# Altium PCB PCB.PcbDoc
Units mm, origin at the board's own origin, x right, y up, seen from the top; angles counter-clockwise.
Board outline 69.6 x 34.75 mm, 4 copper layers (TOP, GND, PWR, BOTTOM), stack 0.905 mm thick; 91 components, 59 nets, 357 pads, 99 vias.
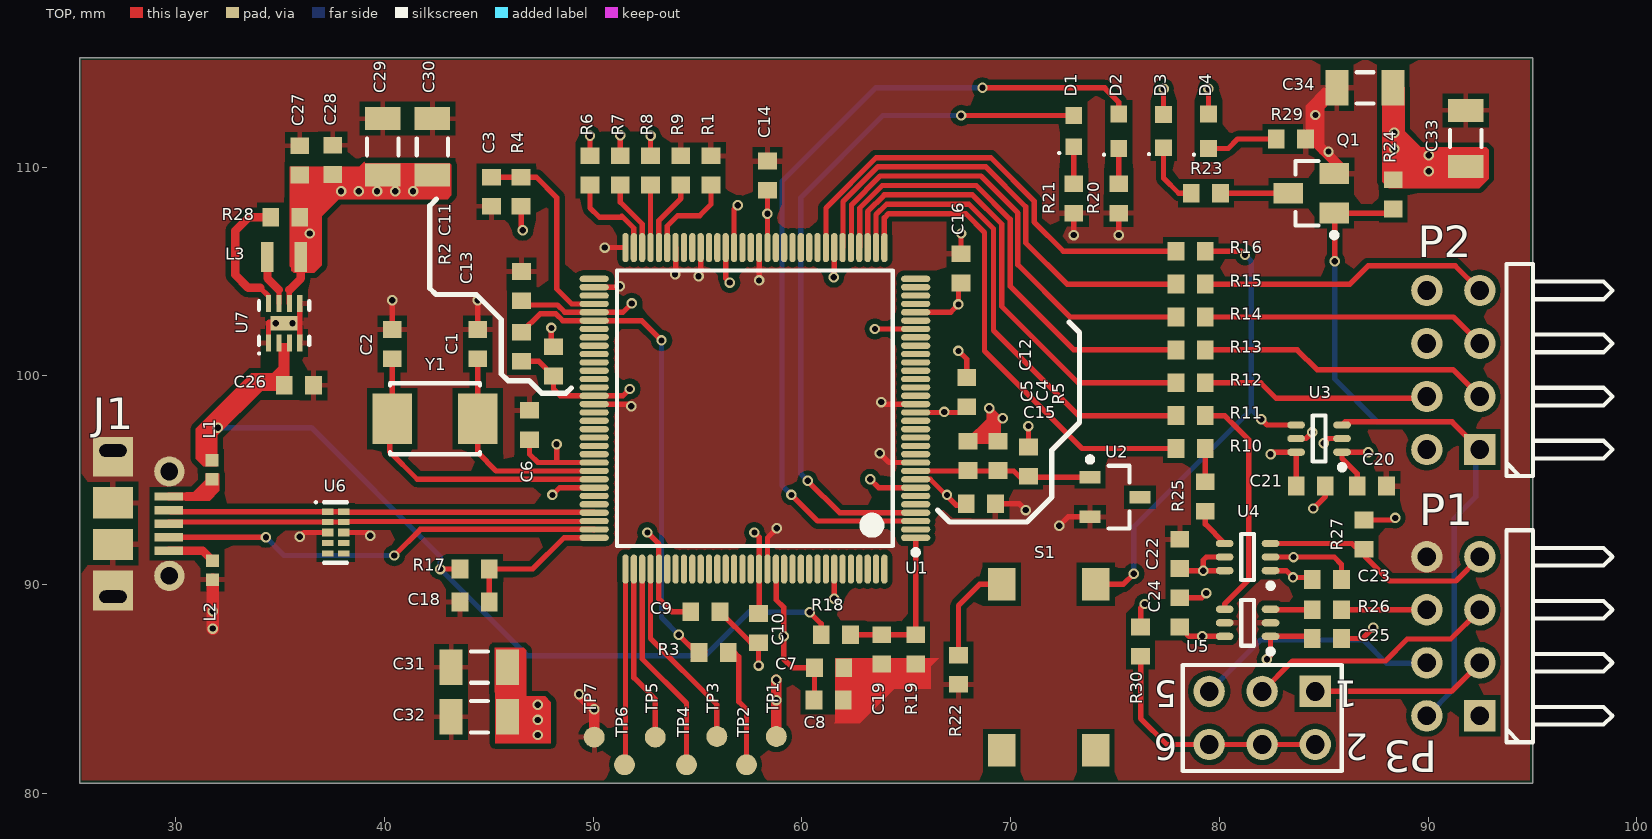
[diagram p0: TOP view]
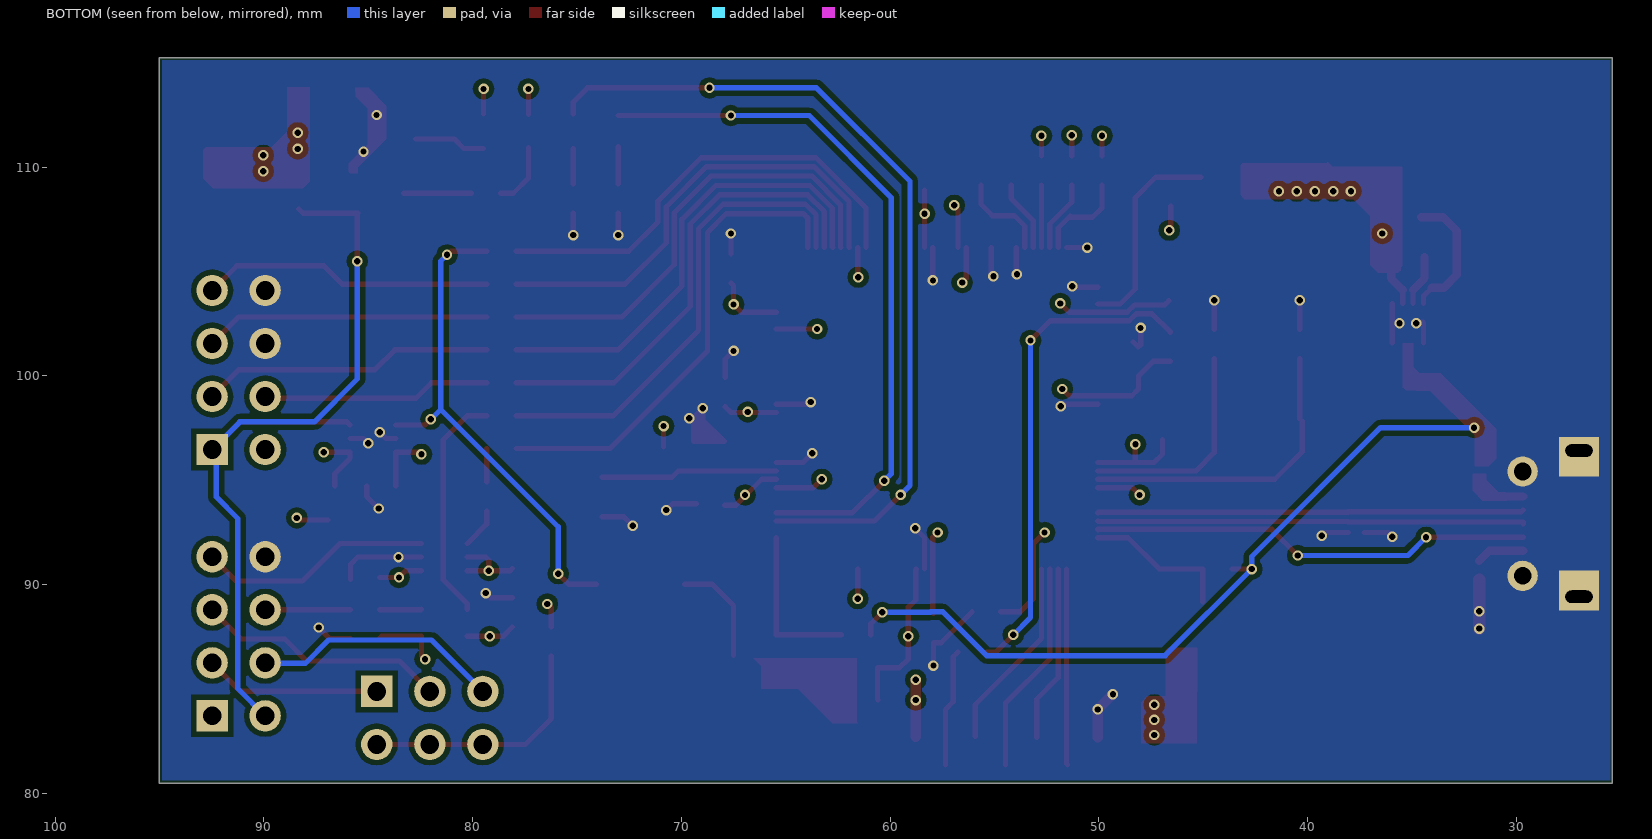
[diagram p1: BOTTOM view, seen from below]
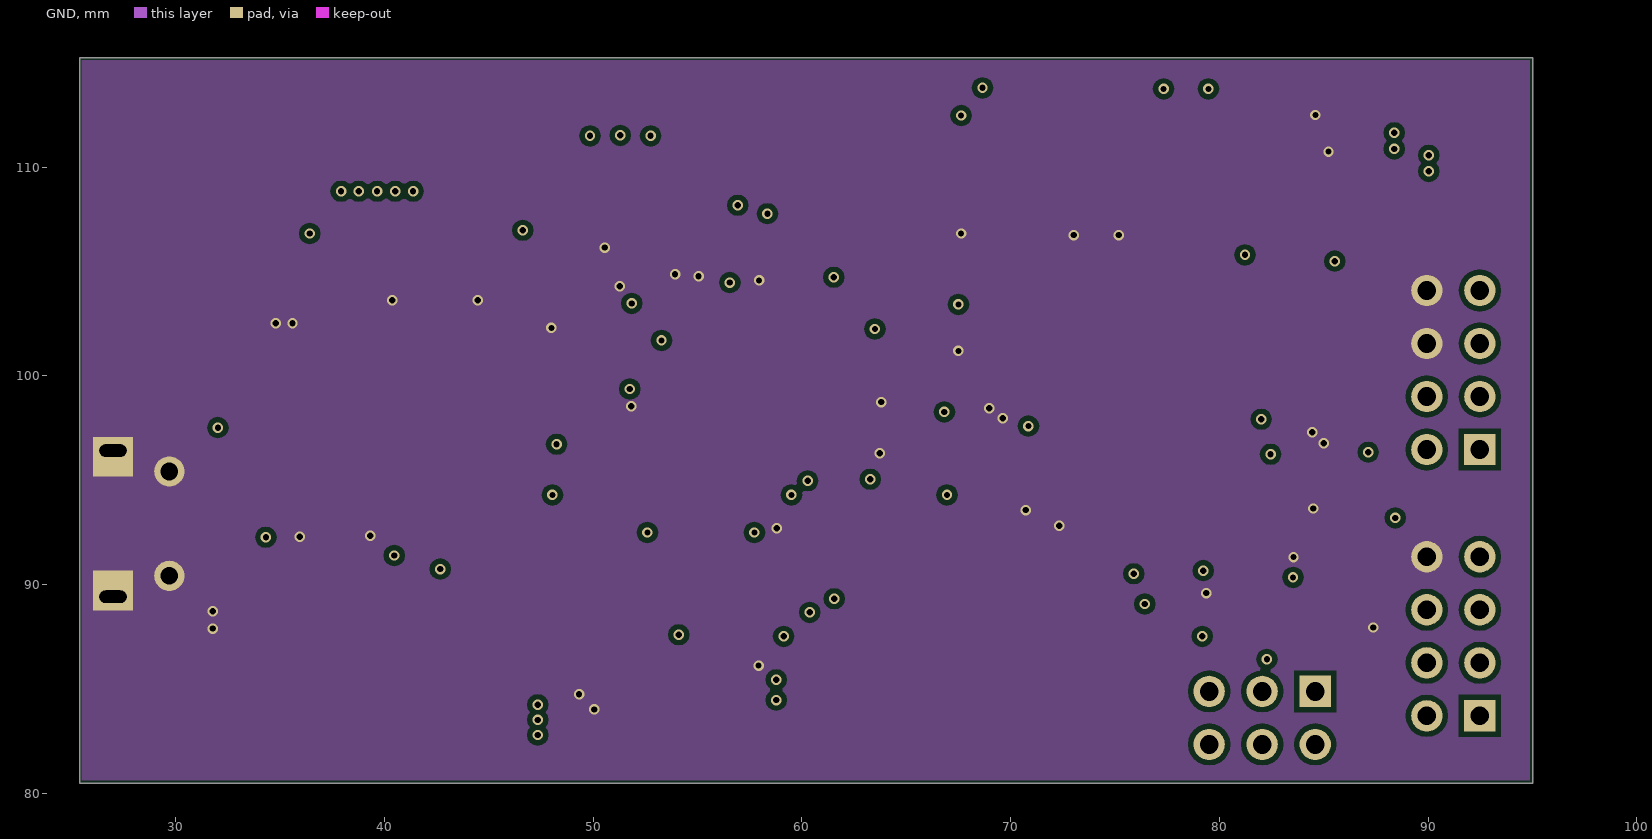
[diagram p2: GND]
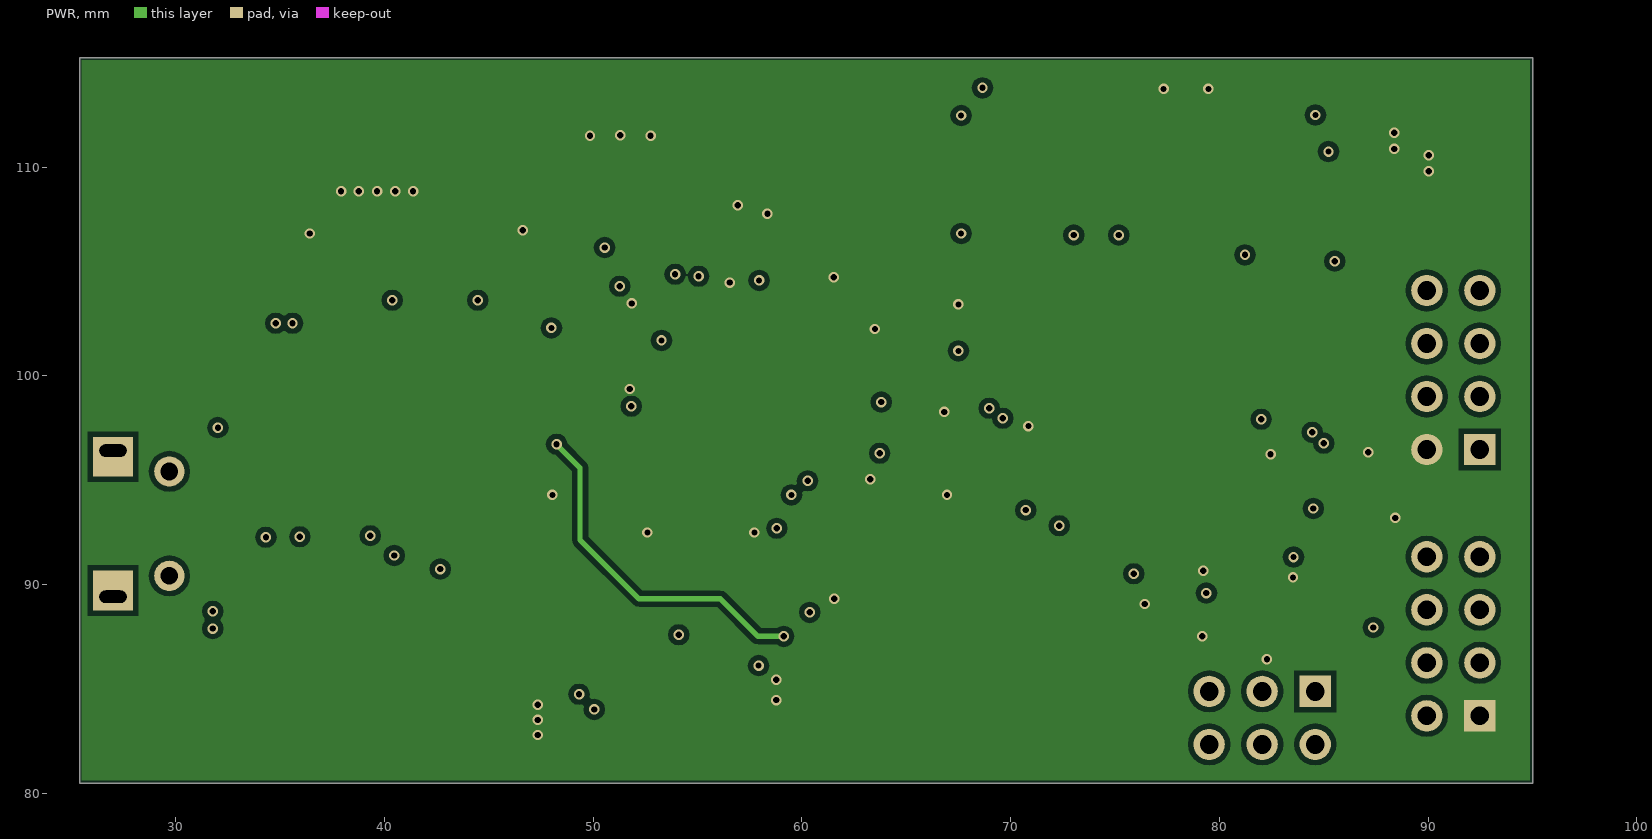
[diagram p3: PWR]

## Layer stack, top to bottom
Top Solder: solder mask 0.025, Solder Resist, Dk 3.5
TOP: signal copper 0.035
Dielectric 1: core 0.255, FR-4, Dk 4.5
GND: signal copper 0.035
Dielectric 3: core 0.255, FR-4, Dk 4.5
PWR: signal copper 0.035
Dielectric 2: core 0.255, FR-4, Dk 4.5
BOTTOM: signal copper 0.035
Bottom Solder: solder mask 0.025, Solder Resist, Dk 3.5

## Board outline
25.4,80.5 95,80.5 95,115.25 25.4,115.25

## Design rules (kind name [scope] priority, off if disabled: settings)
Clearance [All] p1: gap=0.25 ignorepadtopadclearanceinfootprint=FALSE except(0: Arc-Hole Track-Hole SMDPad-Hole THPad-Hole Via-Hole Fill-Hole Poly-Hole Region-Hole Text-Hole; 0.1: Arc-Arc Arc-Track Arc-SMDPad Track-Track Track-SMDPad SMDPad-SMDPad; 0.254: Arc-THPad Arc-Via Arc-Text Track-THPad Track-Via Track-Text SMDPad-THPad SMDPad-Via SMDPad-Text THPad-THPad THPad-Via THPad-Text Via-Via Via-Text Fill-Text Poly-Text Region-Text Text-Text)
PlaneClearance [All] p1: clearance=0.8
PlaneConnect [All] p1: pad.planeconnectstyle=Relief pad.reliefexpansion=0.508 pad.reliefentries=4 pad.reliefconductorwidth=0.254 pad.reliefairgap=0.254 via.planeconnectstyle=Direct via.reliefexpansion=0.508 via.reliefentries=4 via.reliefconductorwidth=0.254 via.reliefairgap=0.254
PolygonConnect [All] p1: thpad.connectstyle=Direct thpad.reliefconductorwidth=0.254 thpad.reliefentries=4 thpad.polygonreliefangle="90 Angle" thpad.airgapwidth=0.254 smdpad.connectstyle=Relief smdpad.reliefconductorwidth=0.254 smdpad.reliefentries=4 smdpad.polygonreliefangle="90 Angle" smdpad.airgapwidth=0.254 via.connectstyle=Direct via.reliefconductorwidth=0.254 via.reliefentries=4 via.polygonreliefangle="90 Angle" via.airgapwidth=0.254
RoutingVias [All] p1: holewidth=0.3 width=0.5 viastyle="Through Hole" minholewidth=0.3 minwidth=0.5 maxholewidth=0.3 maxwidth=0.5
SolderMaskExpansion [All] p1: expansion=0.001
Width [All] p1: maxlimit=0.8 minlimit=0.1 preferedwidth=0.254
28 further rules are at their usual default settings.

## Components (designator, comment, footprint, x,y, rotation, side; value= is the part's Value field where it differs from the comment)
C1 "" 1608[0603] 44.475,101.525 r90 top value=22pF
C2 "" 1608[0603] 40.375,101.525 r90 top value=22pF
C3 "" 1608[0603] 45.125,108.825 r270 top value=1uF
C4 "" 1608[0603] 69.4,96.175 r90 top value=1uF
C5 "" 1608[0603] 67.95,96.175 r90 top value=0.01uF
C6 "" 1608[0603] 46.95,97.65 r90 top value=1uF
C7 "" 1608[0603] 61.3,86.025 r0 top value=2.2uF
C8 "" 1608[0603] 61.275,84.475 r0 top value=0.1uF
C9 "" 1608[0603] 55.375,88.7 r0 top value=0.01uF
C10 "" 1608[0603] 57.925,87.925 r270 top value=0.01uF
C11 "" 1608[0603] 46.575,104.3 r90 top value=0.01uF
C12 "" 1608[0603] 67.9,99.225 r90 top value=0.01uF
C13 "" 1608[0603] 48.1,100.7 r90 top value=0.1uF
C14 "" 1608[0603] 58.35,109.6 r90 top value=0.1uF
C15 "" 1608[0603] 68.575,93.875 r0 top value=1uF
C16 "" 1608[0603] 67.625,105.15 r90 top value=1uF
C18 "" 1608[0603] 44.325,89.175 r180 top value=0.1uF
C19 "" 1608[0603] 63.825,86.9 r270 top value=0.01uF
C20 "" 1608[0603] 87.3,94.725 r0 top value=0.01uF
C21 "" 1608[0603] 84.375,94.725 r0 top value=0.01uF
C22 "" 1608[0603] 78.1,91.475 r90 top value=0.01uF
C23 "" 1608[0603] 85.15,90.25 r0 top value=0.01uF
C24 "" 1608[0603] 78.1,88.675 r90 top value=0.01uF
C25 "" 1608[0603] 85.15,87.425 r0 top value=0.01uF
C26 "" 1608[0603] 35.9,99.55 r0 top value=10uF
C27 "" 1608[0603] 35.95,110.325 r90 top value=22uF
C28 "" 1608[0603] 37.525,110.35 r90 top value=10uF
C29 "" C1206 39.925,110.975 r90 top value=10uF
C30 "" C1206 42.3,110.975 r90 top value=10uF
C31 "" C1206 44.55,86.05 r180 top value=10uF
C32 "" C1206 44.55,83.675 r180 top value=10uF
C33 "" C1206 91.8,111.375 r90 top value=10uF
C34 "" C1206 86.975,113.8 r180 top value=10uF
D1 "GREEN" SODFL160X60-2N 73.025,111.725 r90 top
D2 "RED" SODFL160X80-2N#1 75.175,111.725 r90 top
D3 "YELLOW" SODFL160X80-2N#2 77.325,111.725 r90 top
D4 "RED" SODFL160X80-2N#1 79.475,111.725 r90 top
J1 "105017-0001" 105017-0001 27.075,92.925 r270 top
L1 "10 Ohm" INDC1005X06N 31.75,95.5 r90 top
L2 "10 Ohm" INDC1005X06N 31.775,90.7 r270 top
L3 "BRC2012T2R2MD" INDC2012X10N 35.2,105.7 r0 top
P1 "Header 4X2H" HDR2X4H 92.475,83.72 r90 top
P2 "Header 4X2H" HDR2X4H 92.475,96.475 r90 top
P3 "Header 3X2" HDR2X3 84.59,84.89 r180 top
Q1 "BSS138" SOT95P315X120-3N 84.4,108.75 r180 top
R1 "" 1608[0603] 55.65,109.85 r270 top value=4.87K
R2 "" 1608[0603] 46.575,101.4 r270 top value=10K
R3 "" 1608[0603] 55.775,86.75 r180 top value=100
R4 "" 1608[0603] 46.55,108.825 r90 top value=51
R5 "" 1608[0603] 70.85,95.9 r90 top value=1K
R6 "" 1608[0603] 49.85,109.85 r90 top value=1K
R7 "" 1608[0603] 51.3,109.85 r90 top value=1K
R8 "" 1608[0603] 52.75,109.85 r90 top value=1K
R9 "" 1608[0603] 54.2,109.85 r90 top value=1K
R10 "" 1608[0603] 78.625,96.525 r180 top value=33
R11 "" 1608[0603] 78.625,98.1 r180 top value=33
R12 "" 1608[0603] 78.625,99.675 r180 top value=33
R13 "" 1608[0603] 78.625,101.25 r180 top value=33
R14 "" 1608[0603] 78.625,102.825 r180 top value=33
R15 "" 1608[0603] 78.625,104.4 r180 top value=33
R16 "" 1608[0603] 78.625,105.975 r180 top value=33
R17 "" 1608[0603] 44.325,90.75 r0 top value=100
R18 "" 1608[0603] 61.625,87.6 r0 top value=330K
R19 "" 1608[0603] 65.45,86.9 r90 top value=220K
R20 "" 1608[0603] 75.175,108.5 r90 top value=220
R21 "" 1608[0603] 73.025,108.5 r90 top value=220
R22 "" 1608[0603] 67.5,85.925 r90 top value=100
R23 "" 1608[0603] 79.35,108.75 r180 top value=220
R24 "" 1608[0603] 88.325,108.7 r90 top value=100K
R25 "" 1608[0603] 79.325,94.225 r270 top value=33
R26 "" 1608[0603] 85.15,88.8 r0 top value=33
R27 "" 1608[0603] 86.925,92.4 r270 top value=100K
R28 "" 1608[0603] 35.25,107.6 r0 top value=100K
R29 "" 1608[0603] 83.425,111.35 r180 top value=220
R30 "" 1608[0603] 76.225,87.275 r90 top value=270
S1 "BUTTON" PTS645SK43SMTR92LFS 71.825,86.075 r270 top
TP1 "Test point" Test_Point_1x1 58.775,82.725 r90 top
TP2 "Test point" Test_Point_1x1 57.35,81.375 r90 top
TP3 "Test point" Test_Point_1x1 55.925,82.725 r90 top
TP4 "Test point" Test_Point_1x1 54.475,81.375 r90 top
TP5 "Test point" Test_Point_1x1 52.975,82.7 r90 top
TP6 "Test point" Test_Point_1x1 51.5,81.375 r90 top
TP7 "Test point" Test_Point_1x1 50.05,82.7 r90 top
U1 "TM4C1294NCPDT" TSQFP40P1600X1600X120-128N 57.75,98.45 r180 top
U2 "LM4040B25IDBZR" SOT95P237X112-3N 75,94.2 r0 top
U3 "SN74LVC1T45DCKR" TSOP65P210X110-6N 84.775,97 r180 top
U4 "SN74LVC1T45DCKR" TSOP65P210X110-6N 81.35,91.325 r180 top
U5 "SN74LVC1T45DCKR" TSOP65P210X110-6N 81.35,88.175 r180 top
U6 "TPD4S010DQAR" SON50P100X55-10N 37.665,92.5 r0 top
U7 "TPS62162DSGR" TPS62162DSGR 35.2,102.525 r90 top
Y1 "16MHz" ABM3-16.000MHZ-D2Y-T 42.425,97.95 r0 top

## Footprints (in the part's own frame and the unit in brackets; to place one, negate y for a bottom-side part, rotate by r counter-clockwise, add the part's x,y. Pads: shape width x height; smd on the part's side, far side on the other; paste and mask are expansions set on the pad)
1608[0603] [mm] "Chip Capacitor, Body 1.6x0.8mm, IPC High Density"
  rect 0.8x0.9 smd: 1(-0.7,0) 2(0.7,0)
  body extent -0.87,-0.48 0.87,0.48, height 1.3
105017-0001 [mm] "Molex 105017-0001"
  rect 0.4x1.35 smd: 1(-1.3,2.6) 2(-0.65,2.6) 3(0,2.6) 4(0.65,2.6) 5(1.3,2.6)
  round 1.45 hole 0.85: 6(-2.5,2.625) 7(2.5,2.625)
  rect 1.9x1.9 hole 0.6 slot 1.3 at 90 deg copper offset 0.3,0 mask+0: 8(-3.5,-0.075)
  rect 1.9x1.9 hole 0.6 slot 1.3 at 90 deg copper offset -0.3,0 mask+0: 9(3.5,-0.075)
  rect 1.5x1.9 smd: 10(-1,-0.075) 11(1,-0.075)
  body extent -4.1,-2.65 4.1,2.75, height 2.66
ABM3-16.000MHZ-D2Y-T [mm] "Crystal 16MHz"
  rect 1.9x2.4 smd: 1(-2.05,0) 2(2.05,0)
  silkscreen extent -2.15,-1.7 2.15,1.7, body extent -2.1,-1.7 2.1,1.7, height 1.3
C1206 [mm] "Chip Capacitor, Body 3.2x1.6mm, IPC High Density"
  rect 1.1x1.7 smd: 1(-1.35,0) 2(1.35,0)
  silkscreen extent -0.4,-0.75 0.4,0.75, body extent -1.7,-0.9 1.7,0.9, height 1.3
HDR2X3 [mm] "Connector; Header; 3x2 Position"
  rect 1.5x1.5 hole 0.9: 1(0,0)
  round 1.5 hole 0.9: 2(0,2.54) 3(2.54,0) 4(2.54,2.54) 5(5.08,0) 6(5.08,2.54)
  silkscreen extent -1.27,-1.27 6.35,3.81
HDR2X4H [mm] "Connector; Header; 4x2 Position; Right Angle"
  rect 1.5x1.5 hole 0.9: 1(0,0)
  round 1.5 hole 0.9: 2(0,2.54) 3(2.54,0) 4(2.54,2.54) 5(5.08,0) 6(5.08,2.54) 7(7.62,0) 8(7.62,2.54)
  silkscreen extent -1.27,-6.35 8.89,-1.27
INDC1005X06N [mm] "Chip Inductor, 2-Leads, Body 1.00x0.50mm, IPC Medium Density"
  rect 0.59x0.62 smd: 1(-0.455,0) 2(0.455,0)
  body extent -0.53,-0.28 0.53,0.27, height 0.55
INDC2012X10N [mm] "Chip Inductor, 2-Leads, Body 2.00x1.25mm, IPC Medium Density"
  rect 0.6x1.45 smd: 1(-0.8,0) 2(0.8,0)
  body extent -1.1,-0.72 1.1,0.72, height 1
PTS645SK43SMTR92LFS [mm] "Tactile button, C&K"
  rect 1.55x1.3 smd: 1(-3.95,2.25) 2(4,2.25) 3(-3.95,-2.25) 4(4,-2.25)
  body extent -4.5,-3 4.5,3, height 4.3
SODFL160X60-2N [mm] "SODFL, 2-Leads, Body 0.80x1.60mm, IPC Medium Density"
  rect 0.8x0.8 smd: 1(-0.75,0) 2(0.75,0)
  silkscreen extent -1.1,0.65 -1,0.75, body extent -0.5,-0.4 0.5,0.4, height 0.6
SODFL160X80-2N#1 [mm] "SODFL, 2-Leads, Body 0.80x1.60mm, IPC Medium Density"
  rect 0.8x0.8 smd: 1(-0.825,0) 2(0.825,0)
  silkscreen extent -1.17,0.65 -1.08,0.75, body extent -0.6,-0.4 0.6,0.4, height 0.8
SODFL160X80-2N#2 [mm] "SODFL, 2-Leads, Body 0.75x1.60mm, IPC Medium Density"
  rect 0.8x0.8 smd: 1(-0.8,0) 2(0.8,0)
  silkscreen extent -1.15,0.65 -1.05,0.75, body extent -0.6,-0.4 0.6,0.4, height 0.8
SON50P100X55-10N [mm] "SON, 10-Leads, Body 2.50x1.00mm, Pitch 0.50mm, IPC Medium Density"
  rect 0.55x0.3 smd: 1(-0.385,1) 2(-0.385,0.5) 4(-0.385,-0.5) 5(-0.385,-1) 6(0.385,-1) 7(0.385,-0.5) 9(0.385,0.5) 10(0.385,1)
  rect 0.55x0.4 smd: 3(-0.385,0) 8(0.385,0)
  silkscreen extent -1,-1.45 0.55,1.5, body extent -0.55,-1.3 0.55,1.3, height 0.55
SOT95P237X112-3N [mm] "SOT23, 3-Leads, Body 2.92x2.37mm, Pitch 0.95mm, IPC Medium Density"
  rect 1x0.6 smd: 1(-1.2,0.95) 2(-1.2,-0.95) 3(1.2,0)
  silkscreen extent -1.32,-1.5 0.7,1.92, body extent -0.7,-1.52 0.7,1.52, height 1.12
SOT95P315X120-3N [mm] "SOT23, 3-Leads, Body 2.92x3.15mm, Pitch 0.95mm, IPC Medium Density"
  rect 1.4x1 smd: 1(-1.1,0.95) 2(-1.1,-0.95) 3(1.1,0)
  silkscreen extent -1.23,-1.55 0.75,2.12, body extent -0.75,-1.56 0.75,1.56, height 1.2
Test_Point_1x1 [mm]
  round 1 smd: 1(0,0)
TPS62162DSGR [mm]
  rect 0.8x0.25 smd: 1(-0.95,0.75) 2(-0.95,0.25) 3(-0.95,-0.25) 4(-0.95,-0.75) 5(0.95,-0.75) 6(0.95,-0.25) 7(0.95,0.25) 8(0.95,0.75)
  rect 0.7x1.3 smd: 9(0,0)
  silkscreen extent -1.5,-1.2 1.05,1.25, body extent -1.05,-1.05 1.05,1.05, height 0.8
TSOP65P210X110-6N [mm] "TSOP, 6-Leads, Body 2.00x1.25mm, Pitch 0.65mm, IPC Medium Density"
  oval 0.85x0.35 smd: 1(-1.1,0.65) 2(-1.1,0) 3(-1.1,-0.65) 4(1.1,-0.65) 5(1.1,0) 6(1.1,0.65)
  silkscreen extent -1.23,-1.1 0.3,1.5, body extent -0.7,-1.1 0.7,1.1, height 1.1
TSQFP40P1600X1600X120-128N [mm] "TSQFP, 128-Leads, Body 14.00x14.00mm, Pitch 0.40mm, IPC Medium Density"
  oval 1.4x0.3 smd: 1(-7.7,6.2) 2(-7.7,5.8) 3(-7.7,5.4) 4(-7.7,5) 5(-7.7,4.6) 6(-7.7,4.2) 7(-7.7,3.8) 8(-7.7,3.4) 9(-7.7,3) 10(-7.7,2.6) 11(-7.7,2.2) 12(-7.7,1.8) 13(-7.7,1.4) 14(-7.7,1) 15(-7.7,0.6) 16(-7.7,0.2) 17(-7.7,-0.2) 18(-7.7,-0.6) 19(-7.7,-1) 20(-7.7,-1.4) 21(-7.7,-1.8) 22(-7.7,-2.2) 23(-7.7,-2.6) 24(-7.7,-3) 25(-7.7,-3.4) 26(-7.7,-3.8) 27(-7.7,-4.2) 28(-7.7,-4.6) 29(-7.7,-5) 30(-7.7,-5.4) 31(-7.7,-5.8) 32(-7.7,-6.2) 65(7.7,-6.2) 66(7.7,-5.8) 67(7.7,-5.4) 68(7.7,-5) 69(7.7,-4.6) 70(7.7,-4.2) 71(7.7,-3.8) 72(7.7,-3.4) 73(7.7,-3) 74(7.7,-2.6) 75(7.7,-2.2) 76(7.7,-1.8) 77(7.7,-1.4) 78(7.7,-1) 79(7.7,-0.6) 80(7.7,-0.2) 81(7.7,0.2) 82(7.7,0.6) 83(7.7,1) 84(7.7,1.4) 85(7.7,1.8) 86(7.7,2.2) 87(7.7,2.6) 88(7.7,3) 89(7.7,3.4) 90(7.7,3.8) 91(7.7,4.2) 92(7.7,4.6) 93(7.7,5) 94(7.7,5.4) 95(7.7,5.8) 96(7.7,6.2)
  oval 0.3x1.4 smd: 33(-6.2,-7.7) 34(-5.8,-7.7) 35(-5.4,-7.7) 36(-5,-7.7) 37(-4.6,-7.7) 38(-4.2,-7.7) 39(-3.8,-7.7) 40(-3.4,-7.7) 41(-3,-7.7) 42(-2.6,-7.7) 43(-2.2,-7.7) 44(-1.8,-7.7) 45(-1.4,-7.7) 46(-1,-7.7) 47(-0.6,-7.7) 48(-0.2,-7.7) 49(0.2,-7.7) 50(0.6,-7.7) 51(1,-7.7) 52(1.4,-7.7) 53(1.8,-7.7) 54(2.2,-7.7) 55(2.6,-7.7) 56(3,-7.7) 57(3.4,-7.7) 58(3.8,-7.7) 59(4.2,-7.7) 60(4.6,-7.7) 61(5,-7.7) 62(5.4,-7.7) 63(5.8,-7.7) 64(6.2,-7.7) 97(6.2,7.7) 98(5.8,7.7) 99(5.4,7.7) 100(5,7.7) 101(4.6,7.7) 102(4.2,7.7) 103(3.8,7.7) 104(3.4,7.7) 105(3,7.7) 106(2.6,7.7) 107(2.2,7.7) 108(1.8,7.7) 109(1.4,7.7) 110(1,7.7) 111(0.6,7.7) 112(0.2,7.7) 113(-0.2,7.7) 114(-0.6,7.7) 115(-1,7.7) 116(-1.4,7.7) 117(-1.8,7.7) 118(-2.2,7.7) 119(-2.6,7.7) 120(-3,7.7) 121(-3.4,7.7) 122(-3.8,7.7) 123(-4.2,7.7) 124(-4.6,7.7) 125(-5,7.7) 126(-5.4,7.7) 127(-5.8,7.7) 128(-6.2,7.7)
  silkscreen extent -7.83,-6.6 6.6,7.02, body extent -7,-7 7,7, height 1.2

## Part data
C1 C2 C3 C4 C5 C6 C7 C8 C9 C10 C11 C12 C13 C14 C15 C16 C18 C19 C20 C21 C22 C23 C24 C25 C26 C27 C28 C29 C30 C31 C32 C33 C34: library part Cap, "Capacitor", LatestRevisionDate=17-Jul-2002, LatestRevisionNote="Re-released for DXP Platform.", PackageDescription="Radial Cap, Thru-Hole; 2 Leads; 0.3 in Pin Spacing", PackageReference=RAD-0.3, Published=8-Jun-2000, Publisher="Altium Limited"
D1: library part SML-LX0603GW-TR, "SML-LX0603GW-TR Green LED, Lumex"
D2 D4: library part SML-311UTT86, "SML-311UTT86, Red LED diode, ROHM"
D3: library part 150060YS75000, "150060YS75000 Yellow LED diode, Wurth"
J1: "Micro USB, B type, Molex"
L1 L2: library part BLM15AG100SN1D, "BLM15AG100SN1D¸SMD filter Inductor, Murata"
L3: "Wire-Wound chip power inductor, 2012(metric), Taiyo Yuden"
P1 P2: "Header, 4-Pin, Dual row, Right Angle", LatestRevisionDate=17-Jul-2002, LatestRevisionNote="Re-released for DXP Platform.", Publisher="Altium Limited"
P3: "Header, 3-Pin, Dual row", LatestRevisionDate=17-Jul-2002, LatestRevisionNote="Re-released for DXP Platform.", Publisher="Altium Limited"
Q1: ", FAIRCHILD/ON SEMICONDUCTOR"
R1 R2 R3 R4 R5 R6 R7 R8 R9 R10 R11 R12 R13 R14 R15 R16 R17 R18 R19 R20 R21 R22 R23 R24 R25 R26 R27 R28 R29 R30: library part "Res Semi", "Semiconductor Resistor", LatestRevisionDate=17-Jul-2002, LatestRevisionNote="Re-released for DXP Platform.", PackageDescription="Axial Device, Thru-Hole; 2 Leads; 0.5 in Pin Spacing", PackageReference=AXIAL-0.5, Published=8-Jun-2000, Publisher="Altium Limited"
S1: library part PTS645SK43SMTR92LFS, "PTS645SK43SMTR92LFS Tactile bushbutton, C&K Components"
TP1 TP2 TP3 TP4 TP5 TP6 TP7: library part TP1, "PCB Test Point"
U1: "TI Tiva C microcontroller, PQFN128"
U2: "Precision micropower reference, TI"
U3 U4 U5: "Single-Bit Dual-Supply Bus Transceiver With Configurable Voltage  Translation and 3-State Outputs, TI"
U6: "USB ESD Solution, TI"
U7: library part "x 3-V to 17-V, 1-A Step-Down Converters with DCS-Control", "x 3-V to 17-V, 1-A Step-Down Converters with DCS-Control, TI"
Y1: library part ABM3-16.000MHZ-D2Y-T, "Crystal 16 MHz, Abracon corporation"

## Via types
v1: diameter 0.5, hole 0.3, TOP to BOTTOM, 99 vias

## Nets (pads, with @x,y where several pads share a name; then routed paths per layer and width w, separated by ;. In a path a pad name is that pad's centre, name@x,y a point inside that pad or via, vN(x,y) a via of type N, cw(c..) or ccw(c..) an arc to the next point about the centre after c; other vN are vias at no path point)
3V3: C9.1 C10.1 C11.1 C12.1 C13.1 C14.1 C15.1 C16.1 C20.1 C21.1 C22.1 C23.1 C24.1 C25.1 C27.1 C28.1 C29.1 C30.1 C31.1 C32.1 C33.1 C34.1 D3.2 D4.2 L3.2 P1.1 P2.2 R2.2 R4.1 R5.2 R6.2 R7.2 R8.2 R24.2 R27.1 R28.2 R30.2 TP1.1 U1.7 U1.8 U1.16 U1.26 U1.28 U1.39 U1.47 U1.51 U1.52 U1.69 U1.79 U1.90 U1.101 U1.113 U1.122 U3.1 U3.6 U4.1 U4.5 U4.6 U5.1 U5.6 U7.6 | length 78.8
  TOP w0.254: U7.6 35.45,104.125 ; R4.1 46.55,107.05 v1(46.625,106.975) ; R2.2 47.4,100.7 C13.1 48.1,99.375 48.425,99.05 U1.79 51.425,99.05 v1(51.75,99.375) ; C11.1@46.65,103.6 46.85,103.4 48.293,103.4 48.643,103.05 U1.69 51.425,103.05 v1(51.85,103.475) ; v1(48.05,94.3) 48.4,94.65 U1.90 ; R6.2 v1(49.85,111.5) ; R7.2 v1(51.3,111.525) ; v1(52.6,92.5) 53.15,91.95 U1.101 53.15,89.325 53.775,88.7 C9.1 C9.1@54.7,88.7 ; R8.2 v1(52.75,111.5) ; U1.52 56.35,104.675 v1(56.55,104.475) ; U1.51 56.75,108 v1(56.925,108.175) ; v1(57.725,92.5) 57.95,92.275 U1.113 57.95,88.65 C10.1 ; U1.47 C14.1 ; v1(61.525,104.725) 61.55,104.75 U1.39 ; v1(61.55,89.325) U1.122 ; v1(63.275,95.05) 63.675,94.65 U1.7 ; v1(63.5,102.25) U1.26 ; U1.8 66.15,95.05 67.4,93.8 C15.1@67.925,93.8 ; U1.16 67.625,98.25 C12.1 ; U1.28 67.125,103.05 v1(67.5,103.425) 67.5,104.325 C16.1 ; R5.2 v1(70.85,97.6) ; R30.2 76.225,88.875 v1(76.425,89.075) ; D3.2 v1(77.325,113.75) ; C24.1 78.55,87.525 v1(79.175,87.525) U5.6 ; C22.1 78.2,90.675 v1(79.225,90.675) ; D4.2 v1(79.475,113.75) ; U4.6 v1(79.225,90.675) ; U4.5 79.375,91.325 79.225,91.175 v1(79.225,90.675) ; v1(82.275,86.425) 82.45,86.6 U5.1 84.35,87.525 C25.1 ; U4.1 83.2,90.675 v1(83.525,90.35) C23.1@84.45,90.35 ; v1(82.45,96.25) 82.55,96.35 U3.6 C21.1 ; C20.1 86.6,95.325 85.875,96.05 U3.1 v1(87.125,96.35) ; R27.1 88.325,93.1 v1(88.425,93.2)
  TOP w0.4: 35.45,104.125 36,104.675 L3.2
  TOP w0.5: TP1.1 v1(58.775,84.475) v1(58.775,85.45)
  other v1: 47.35,82.8 47.35,83.525 47.35,84.25 66.95,94.3 66.825,98.275 36.425,106.825 58.35,107.775 37.925,108.85 38.775,108.85 39.65,108.85 40.525,108.85 41.375,108.85 90.025,109.8 90.025,110.575 88.375,110.875 88.375,111.65
DBG_JTAG_TCK: P2.4 R12.1 | length 10.8
  TOP w0.254: R12.1 81.975,99.675 82.717,98.933 P2.4@89.789,98.933
DBG_JTAG_TDI: P2.7 R15.1 | length 14
  TOP w0.254: R15.1 86.25,104.4 87.125,105.275 91.295,105.275 P2.7
DBG_JTAG_TDO: P2.5 R14.1 | length 13.7
  TOP w0.254: R14.1 91.205,102.825 P2.5
DBG_JTAG_TMS: P2.3 R13.1 | length 14.1
  TOP w0.254: R13.1 83.725,101.25 84.675,100.3 91.19,100.3 P2.3
DBG_RX: P1.7 R27.2 U4.3 | length 11.2
  TOP w0.254: U4.3 86.35,91.975 88.143,90.182 91.325,90.182 P1.7@92.456,91.313
DBG_TX: P1.6 R26.2 | length 4.1
  TOP w0.254: R26.2 89.889,88.8 P1.6@89.916,88.773
DBG_UART_RX: R10.1 R25.1 | length 1.6
  TOP w0.254: R25.1 R10.1
DBG_UART_TX: R11.1 U5.4 | length 11.2
  TOP w0.254: R11.1 80.25,98.1 81.4,96.95 81.4,90.225 80.25,89.075 U5.4
GND: C1.2 C2.2 C3.2 C4.2 C5.2 C6.2 C7.2 C8.2 C9.2 C10.2 C11.2 C12.2 C13.2 C14.2 C15.2 C16.2 C18.2 C19.2 C20.2 C21.2 C22.2 C23.2 C24.2 C25.2 C26.2 C27.2 C28.2 C29.2 C30.2 C31.2 C32.2 C33.2 C34.2 J1.6 J1.7 J1.8 J1.9 J1.10 J1.11 L2.2 P1.8 P2.6 P2.8 Q1.2 R1.1 R9.2 R19.1 R20.1 R21.1 R22.1 R29.1 TP7.1 U1.10 U1.17 U1.48 U1.55 U1.58 U1.64 U1.66 U1.80 U1.114 U2.2 U3.2 U3.5 U4.2 U5.2 U5.5 U6.3 U6.8 U7.1 U7.4 U7.5 U7.9 | length 55.3
  TOP w0.254: U7.1 34.45,102.55 34.475,102.575 34.75,102.575 v1(34.8,102.525) ; v1(35.95,92.3) 36.15,92.5 U6.3 ; U7.4 U7.5 ; U6.8 39.175,92.5 v1(39.325,92.35) ; C2.2 v1(40.375,103.625) ; C1.2 v1(44.475,103.625) ; v1(48,102.3) 48,101.5 C13.2 48.125,101.4 C13.2@48.354,101.629 ; U1.80 51.725,98.65 v1(51.825,98.55) ; U1.66 51.225,104.25 v1(51.275,104.3) ; v1(50.55,106.15) U1.64 ; v1(53.925,104.875) 53.95,104.9 U1.58 ; v1(55.05,104.775) 55.15,104.875 U1.55 ; C9.2 57.55,87.225 C10.2 v1(57.925,86.125) ; v1(57.95,104.575) U1.48 ; U1.114 58.35,92.25 v1(58.8,92.7) ; v1(63.725,96.3) 64.175,95.85 U1.10 ; v1(63.8,98.75) 63.9,98.65 U1.17 ; v1(67.5,101.2) 67.9,100.8 C12.2 ; v1@67.6,106.725 67.625,106.7 C16.2 ; v1(68.975,98.45) 68.975,97.9 C5.2 C4.2 69.4,97.75 v1(69.625,97.975) ; C15.2 70.425,93.875 v1(70.725,93.575) ; v1(72.325,92.825) 72.75,93.25 U2.2 ; v1(73.025,106.75) R21.1 ; v1(75.175,106.75) R20.1 ; C24.2 79.15,89.375 v1(79.375,89.6) ; U4.2 v1(83.55,91.325) 85.5,91.325 85.85,90.975 C23.2 ; U3.5 84.15,97 v1(84.45,97.3) ; v1(84.5,93.65) 85.075,94.225 C21.2 ; v1(85,96.775) 85.225,97 U3.2 ; C25.2 86.85,87.425 v1(87.375,87.95)
  TOP w0.5: v1(49.325,84.75) v1(50.05,84.025) TP7.1
  TOP w0.6: v1(31.775,87.9) v1(31.775,88.725) L2.2
  other v1: 35.6,102.525 67.625,106.825 85.225,110.75 84.6,112.5
IRST: R3.1 TP2.1 | length 5.6
  TOP w0.254: R3.1@56.75,86.775 56.975,86.55 56.975,84.4 57.35,84.025 TP2.1
ITCK: TP3.1 U1.100 | length 9.3
  TOP w0.254: U1.100 52.75,87.425 55.925,84.25 TP3.1
ITDI: TP5.1 U1.98 | length 8.5
  TOP w0.254: U1.98 51.95,85.55 52.975,84.525 TP5.1
ITDO: TP6.1 U1.97 | length 9.4
  TOP w0.254: TP6.1 51.55,81.425 U1.97
ITMS: TP4.1 U1.99 | length 10.3
  TOP w0.254: U1.99 52.35,86.45 54.475,84.325 TP4.1
NetC1_1: C1.1 U1.88 Y1.2 | length 10.4
  TOP w0.254: C1.1 Y1.2 44.475,96.325 45.35,95.45 U1.88
NetC2_1: C2.1 U1.89 Y1.1 | length 14.9
  TOP w0.254: C2.1 Y1.1 40.25,97.825 40.25,96.375 41.575,95.05 U1.89
NetC3_1: C3.1 R4.2 U1.68 | length 10
  TOP w0.254: C3.1 R4.2 47.275,109.525 48.25,108.55 48.25,104.175 48.975,103.45 U1.68
NetC6_1: C6.1 C7.1 C8.1 U1.87 U1.115 | length 29.2
  TOP w0.254: C6.1 46.95,96.25 47.35,95.85 48.25,95.85 ; v1(48.25,96.725) 48.25,95.85 ; U1.87 48.25,95.85 ; U1.115 58.773,90.727 58.773,89.277 59.125,88.925 v1(59.125,87.525) 59.125,86.45 59.55,86.025 C7.1 60.6,84.5 C8.1
  PWR w0.254: v1(48.25,96.725) 49.375,95.6 49.375,92.15 52.2,89.325 56.1,89.325 57.9,87.525 v1(59.125,87.525)
NetC18_1: C18.1 R17.2 U1.96 | length 7.2
  TOP w0.254: C18.1 R17.2 47.1,90.75 48.6,92.25 U1.96
NetC19_1: C19.1 R18.2 R19.2 U1.1 | length 7.8
  TOP w0.254: R18.2 R19.2 U1.1
NetD1_1: D1.1 R21.2 | length 1.8
  TOP w0.254: R21.2 D1.1
NetD1_2: D1.2 U1.4 | length 34.2
  TOP w0.254: v1(60.275,94.975) 61.8,93.45 U1.4 ; v1(67.625,112.475) D1.2
  BOTTOM w0.254: v1(60.275,94.975) 59.95,95.3 59.95,108.55 63.875,112.475 v1(67.625,112.475)
NetD2_1: D2.1 R20.2 | length 1.7
  TOP w0.254: R20.2 D2.1
NetD2_2: D2.2 U1.3 | length 40.5
  TOP w0.254: v1(59.5,94.3) 60.75,93.05 U1.3 ; v1(68.65,113.8) 74.5,113.8 75.175,113.125 D2.2
  BOTTOM w0.254: v1(59.5,94.3) 59.05,94.75 59.05,109.325 63.525,113.8 v1(68.65,113.8)
NetD3_1: D3.1 R23.2 | length 3.1
  TOP w0.254: D3.1 77.325,109.475 78.05,108.75 R23.2
NetD4_1: D4.1 R29.2 | length 3.4
  TOP w0.254: D4.1 80.425,110.9 80.875,111.35 R29.2
NetJ1_1: J1.1 L1.1 | length 2.4
  TOP w0.4: J1.1 30.93,94.225 L1.1
NetJ1_5: J1.5 L2.1 | length 2.3
  TOP w0.4: J1.5 31.305,91.625 L2.1
NetL3_1: L3.1 U7.7 | length 2.5
  TOP w0.254: U7.7 34.95,104.125
  TOP w0.4: L3.1 34.4,104.675 34.95,104.125
NetP3_2: P3.2 P3.4 P3.6 R30.1 | length 11.9
  TOP w0.254: R30.1 76.225,83.6 77.475,82.35 P3.6 P3.4 P3.2
NetQ1_3: Q1.3 R23.1 | length 3.3
  TOP w0.254: R23.1 Q1.3
NetR1_2: R1.2 U1.59 | length 4.5
  TOP w0.254: U1.59 53.55,107.175 54.05,107.675 55.1,107.675 55.65,108.225 R1.2
NetR2_1: R2.1 R3.2 U1.70 | length 23.6
  TOP w0.254: R2.1 47.45,102.975 48.217,102.975 48.542,102.65 U1.70 52.325,102.65 v1(53.275,101.7) ; v1(54.1,87.6) 54.925,86.775 R3.2@55.35,86.775
  BOTTOM w0.254: v1(53.275,101.7) 53.275,88.425 v1(54.1,87.6)
NetR6_1: R6.1 U1.63 | length 4.6
  TOP w0.254: R6.1 49.85,108.05 50.3,107.6 51.325,107.6 51.375,107.65 51.95,107.075 U1.63
NetR7_1: R7.1 U1.62 | length 3.4
  TOP w0.254: R7.1 51.3,108.325 52.35,107.275 U1.62
NetR8_1: R8.1 U1.61 | length 3
  TOP w0.254: U1.61 R8.1
NetR9_1: R9.1 U1.60 | length 3.4
  TOP w0.254: U1.60 53.15,107.45 54.2,108.5 R9.1
NetR10_2: R10.2 U1.33 | length 23.5
  TOP w0.254: U1.33 63.95,107.575 64.15,107.775 67.85,107.775 68.75,106.875 68.75,101.2 73.425,96.525 R10.2
NetR11_2: R11.2 U1.34 | length 23.2
  TOP w0.254: U1.34 63.55,107.725 64.05,108.225 68,108.225 69.175,107.05 69.175,102.175 73.25,98.1 R11.2
NetR12_2: R12.2 U1.35 | length 22.9
  TOP w0.254: U1.35 63.15,107.875 63.95,108.675 68.175,108.675 69.575,107.275 69.575,103.325 73.225,99.675 R12.2
NetR13_2: R13.2 U1.36 | length 22.6
  TOP w0.254: U1.36 62.773,106.173 62.773,108.048 63.85,109.125 68.35,109.125 69.975,107.5 69.975,104.3 73.025,101.25 R13.2
NetR14_2: R14.2 U1.37 | length 22.4
  TOP w0.254: U1.37 62.373,106.15 62.373,108.198 63.75,109.575 68.576,109.575 70.346,107.805 70.346,105.329 72.85,102.825 R14.2
NetR15_2: R15.2 U1.38 | length 22.2
  TOP w0.254: U1.38 61.973,106.173 61.973,108.348 63.65,110.025 68.8,110.025 70.725,108.1 70.725,106.375 72.7,104.4 R15.2
NetR16_2: R16.2 U1.40 | length 22.1
  TOP w0.254: U1.40 61.15,108.05 63.55,110.45 69.05,110.45 71.125,108.375 71.125,107.375 72.525,105.975 R16.2
NetR22_2: R22.2 S1.3 | length 5.1
  TOP w0.254: R22.2 67.5,89 68.525,90.025 S1.3 S1.3@69.85,90.025
NetR25_2: R25.2 U4.4 | length 1.9
  TOP w0.254: R25.2 79.325,92.9 U4.4
NetR26_1: R26.1 U5.3 | length 2
  TOP w0.254: U5.3 82.475,88.8 R26.1
NetR28_1: R28.1 U7.8 | length 6.4
  TOP w0.254: 34.05,104.225 34.45,103.825 U7.8
  TOP w0.4: 34.05,104.225 33.475,104.225 32.85,104.85 32.85,106.95 33.5,107.6 R28.1
PROG0: P1.3 P3.1 | length 8.4
  TOP w0.254: P3.1 91.113,84.89 P1.3@92.456,86.233
PROG1: P1.5 P3.3 | length 12
  TOP w0.254: P3.3 83.51,86.35 87.95,86.35 89,87.4 91.083,87.4 P1.5@92.456,88.773
PROG2: P1.4 P3.5 | length 11.9
  BOTTOM w0.254: P3.5 81.97,87.35 86.9,87.35 88.017,86.233 P1.4@89.916,86.233
PROG_RESET: R16.1 S1.1 U3.4 | length 24.2
  TOP w0.254: S1.1 75.4,90.025 v1(75.9,90.525) ; R16.1 81.05,105.975 v1(81.225,105.8) ; v1(82,97.925) 82.275,97.65 U3.4
  BOTTOM w0.254: v1(75.9,90.525) 75.9,92.775 81.525,98.4 ; v1(81.225,105.8) 81.525,105.5 81.525,98.4 ; v1(82,97.925) 81.525,98.4
TARGET_RESET: P1.2 P2.1 Q1.1 R24.1 U3.3 | length 40.1
  TOP w0.254: v1(85.525,105.5) 85.525,107.775 Q1.1 88.125,107.8 R24.1 ; U3.3 86.025,97.8 91.15,97.8 P2.1
  BOTTOM w0.254: v1(85.525,105.5) 85.525,99.85 87.575,97.8 91.15,97.8 P2.1 ; P1.2@89.916,83.693 91.25,85.027 91.25,93.175 92.275,94.2 92.275,96.339 P2.1@92.329,96.393
USB_DM: J1.2 U1.93 U6.1 U6.10 | length 20.4
  TOP w0.254: J1.2 29.75,93.5 U6.1 U6.10 38.05,93.473 50.027,93.473 U1.93
USB_DP: J1.3 U1.94 U6.2 U6.9 | length 20.5
  TOP w0.254: J1.3 29.675,93 U6.2 U6.9 38.05,93.027 50.027,93.027 U1.94
USB_ID: J1.4 U1.95 | length 21.3
  TOP w0.254: J1.4 v1(34.325,92.275) ; v1(40.475,91.4) 41.725,92.65 U1.95 U1.95@50.027,92.627
  BOTTOM w0.254: v1(34.325,92.275) 35.2,91.4 v1(40.475,91.4)
USB_VBUS: C26.1 L1.2 R17.1 R18.1 U7.2 U7.3 | length 43.8
  TOP w0.254: v1(42.675,90.75) R17.1 ; v1(60.375,88.675) 60.925,88.125 R18.1
  TOP w0.5: L1.2 31.75,97.25 v1(32.025,97.525) 34.05,99.55 C26.1 35.2,101.325
  BOTTOM w0.254: v1(32.025,97.525) 36.5,97.525 42.675,91.35 v1(42.675,90.75) 46.825,86.6 55.375,86.6 57.475,88.7 58.05,88.7 58.075,88.675 v1(60.375,88.675)
VREF: C4.1 C5.1 R5.1 U1.9 U2.1 | length 8.5
  TOP w0.254: U1.9 69.4,95.45 70.15,95.45 70.45,95.15 U2.1
pads on no net: S1.2 S1.4 U1.2 U1.5 U1.6 U1.11 U1.12 U1.13 U1.14 U1.15 U1.18 U1.19 U1.20 U1.21 U1.22 U1.23 U1.24 U1.25 U1.27 U1.29 U1.30 U1.31 U1.32 U1.41 U1.42 U1.43 U1.44 U1.45 U1.46 U1.49 U1.50 U1.53 U1.54 U1.56 U1.57 U1.65 U1.67 U1.71 U1.72 U1.73 U1.74 U1.75 U1.76 U1.77 U1.78 U1.81 U1.82 U1.83 U1.84 U1.85 U1.86 U1.91 U1.92 U1.102 U1.103 U1.104 U1.105 U1.106 U1.107 U1.108 U1.109 U1.110 U1.111 U1.112 U1.116 U1.117 U1.118 U1.119 U1.120 U1.121 U1.123 U1.124 U1.125 U1.126 U1.127 U1.128 U2.3 U6.4 U6.5 U6.6 U6.7

## Polygon pours and split planes (outlines as drawn)
GND on TOP "GND_L01_P000" (solid, remove dead copper, pour order 0): 25.5,115.125 25.5,80.625 94.875,80.625 94.875,115.125
GND on GND "GND_L02_P002" (solid, remove dead copper, pour order 2): 25.5,115.125 25.5,80.625 94.875,80.625 94.875,115.125
3V3 on PWR "3V3_L03_P004" (solid, remove dead copper, pour order 4): 25.5,115.125 25.5,80.625 94.875,80.625 94.875,115.125
GND on BOTTOM "GND_L04_P006" (solid, remove dead copper, pour order 6): 25.5,115.125 25.5,80.625 94.875,80.625 94.875,115.125

## Other copper
TOP:
  region net GND: 68.975,98.625 69.625,97.975 69.4,97.75 69.4,96.875 67.95,96.875 68.975,97.9
  region net GND: 85.625,113.8 84.975,113.8 84.125,112.95 84.125,111.35 85.5,109.975 85.5,109.7 85.875,109.7 85.925,109.75 85.925,110.2 85.025,111.1 85.025,111.875 85.025,112.8 85.6,113.375
  region net 3V3: 35.475,110.025 38.8,110.025 39.025,110.25 39.075,110.2 43.125,110.2 43.2,110.125 43.2,108.65 43.025,108.475 37.825,108.475 37,107.65 37,105.3 36.65,104.95 35.65,104.95 35.55,105.05 35.55,105.175 35.475,105.25
  region net USB_VBUS: 34.95,101.575 35.45,101.575 35.45,99.425 34.95,99.425 34.825,99.3 34.15,99.3 32,97.15 32,95.7 31.975,95.675 31.325,95.675 30.975,96.025 30.975,97.475 33.625,100.125 34.625,100.125 34.95,100.45
  region net NetJ1_1: 31.45,95.325 31.45,95.025 30.85,94.425 30.475,94.425 30.475,94.1 30.425,94.05 30.45,94.025 31.625,94.025 32.1,94.5 32.1,95.325
  region net 3V3: 45.275,86.975 46.675,86.975 46.8,86.85 46.8,82.775 46.725,82.7 45.3,82.7
  region net 3V3: 45.3,84.65 47.7,84.65 47.975,84.375 47.975,82.4 45.3,82.4
  region net 3V3: 87.8,113.825 87.8,109.3 88.1,109 92.45,109 92.9,109.45 92.9,110.825 92.775,110.95 89.65,110.95 88.875,111.725 88.875,113.825
  pour cut-out: 66,105.058 66.017,105.075 68.975,105.075 71.75,102.3 71.75,96.225 71.4,95.875 70.75,95.875 70.425,96.2 65.95,96.2
  pour cut-out: 66.921,106.504 66.921,107.371 67.125,107.575 67.75,107.575 68.1,107.225 68.1,106.5
  pour cut-out: 79.825,104.375 85.925,104.375 86.875,105.325 91.4,105.325 92.15,104.575 92.15,103.325 92.075,103.25 92.075,100.275 91.7,99.9 84.775,99.9 83.375,101.3 79.825,101.3
  region net GND: 61.6,86.475 61.6,83.425 61.55,83.375 62.775,83.375 64.425,85.025 66.175,85.025 66.175,86.1 66.55,86.475
  pour cut-out: 85.35,88.625 85.3,88.575 85.3,86.75 85.6,86.45 87.6,86.45 88.875,87.725 88.875,88.625
  pour cut-out: 81.65,96.175 81.65,98.35 83.65,98.35 83.975,98.675 84.025,98.625 85.9,98.625 86.6,97.925 86.6,94.725 86.45,94.575 86.45,92.45 86.225,92.225 81.95,92.225 81.625,92.55

## Silkscreen, mask and mechanical layers (free items; w line width, h text height)
Top Overlay:
  lines w0.254: 42.5,108.475 42.175,108.15 42.175,107.8 42.175,104.2 42.475,103.9 44.4,103.9 45.6,102.7 45.6,100.1 45.925,99.775 46.925,99.775 47.525,99.175 48,99.175 48.7,99.175 48.95,99.425 ; 66.5,93.575 67.075,93 67.775,93 70.775,93 71.975,94.2 71.975,96.45 73.3,97.775 73.3,102.025 73.3,102.075 72.8,102.575

## Text inside footprints (layer, text, board x,y; h text height)
P3: Top Overlay "1" at 86.622,85.398 h1.27 r180; Top Overlay "2" at 87.13,82.858 h1.27 r180; Top Overlay "5" at 77.986,85.398 h1.27 r180; Top Overlay "6" at 77.986,82.858 h1.27 r180